# Altium PCB PCB.PcbDoc
Units mm, origin at the board's own origin, x right, y up, seen from the top; angles counter-clockwise.
Board outline 46.18 x 31.32 mm, 2 copper layers (Top Layer, Bottom Layer); 9 components, 7 nets, 25 pads, 0 vias.
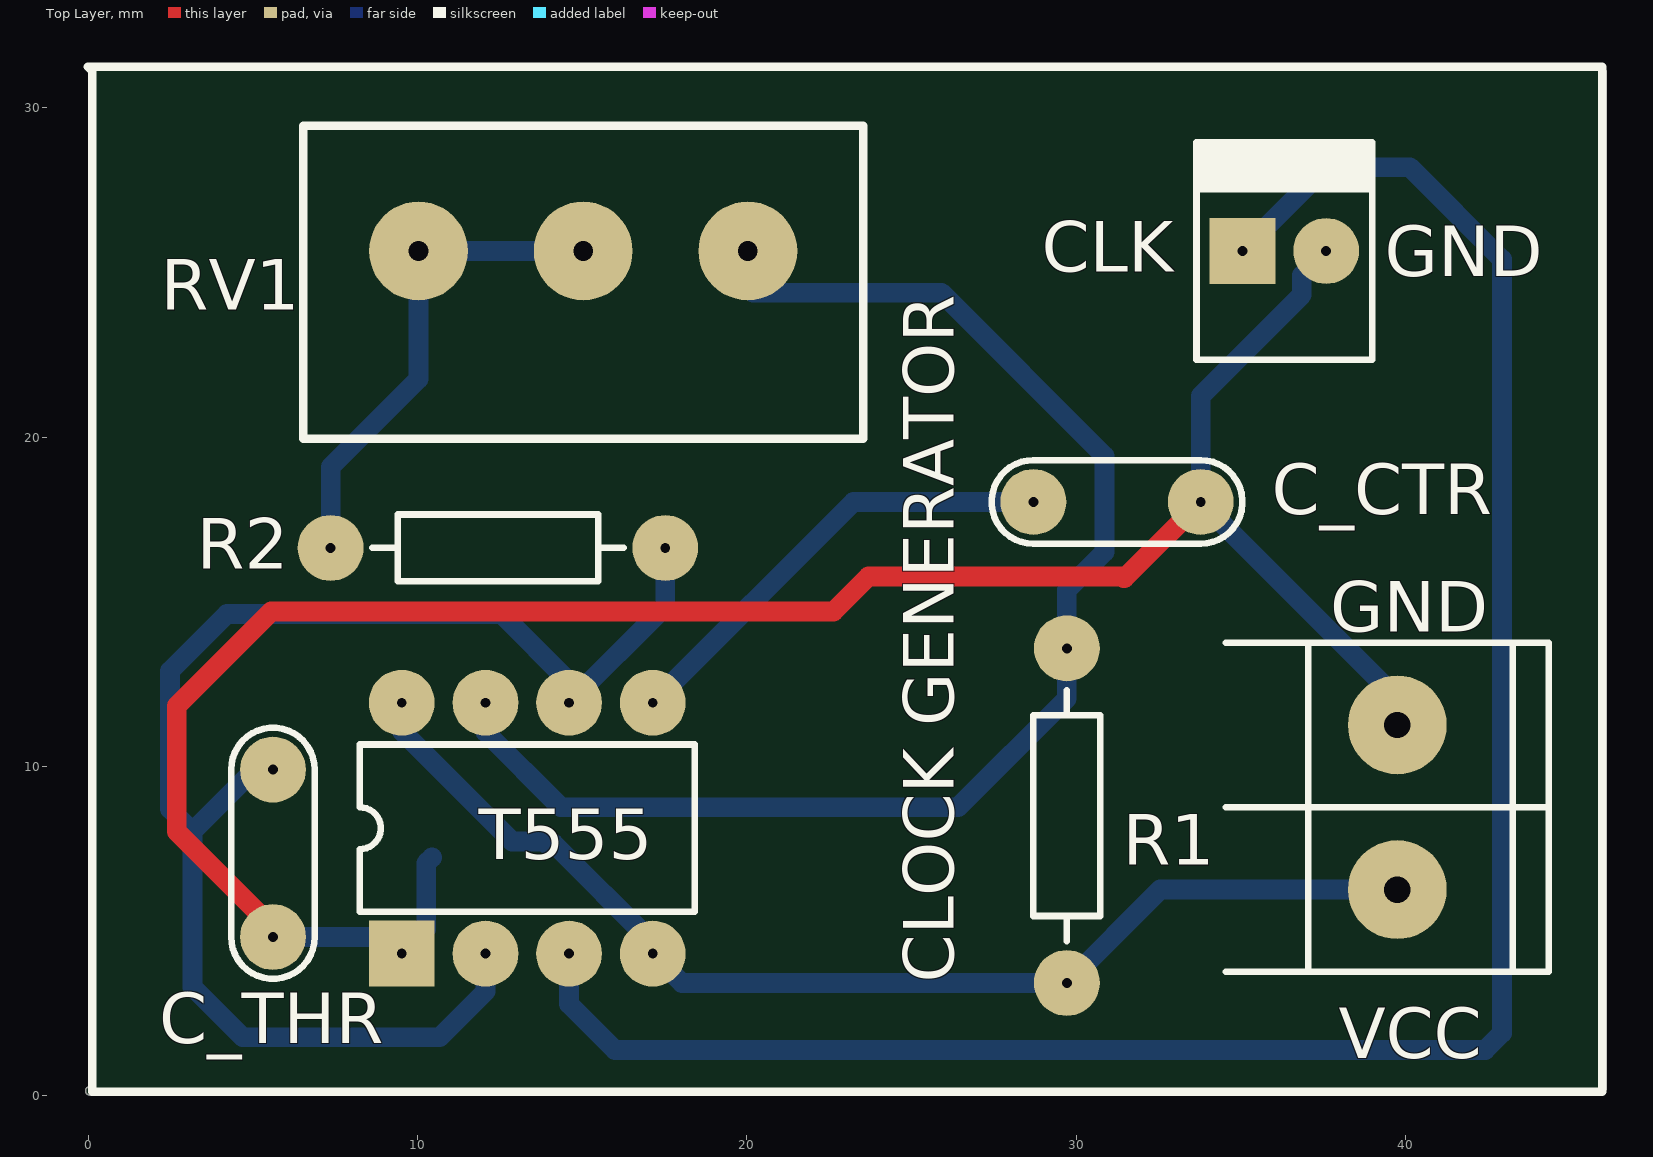
[diagram p0: Top Layer view]
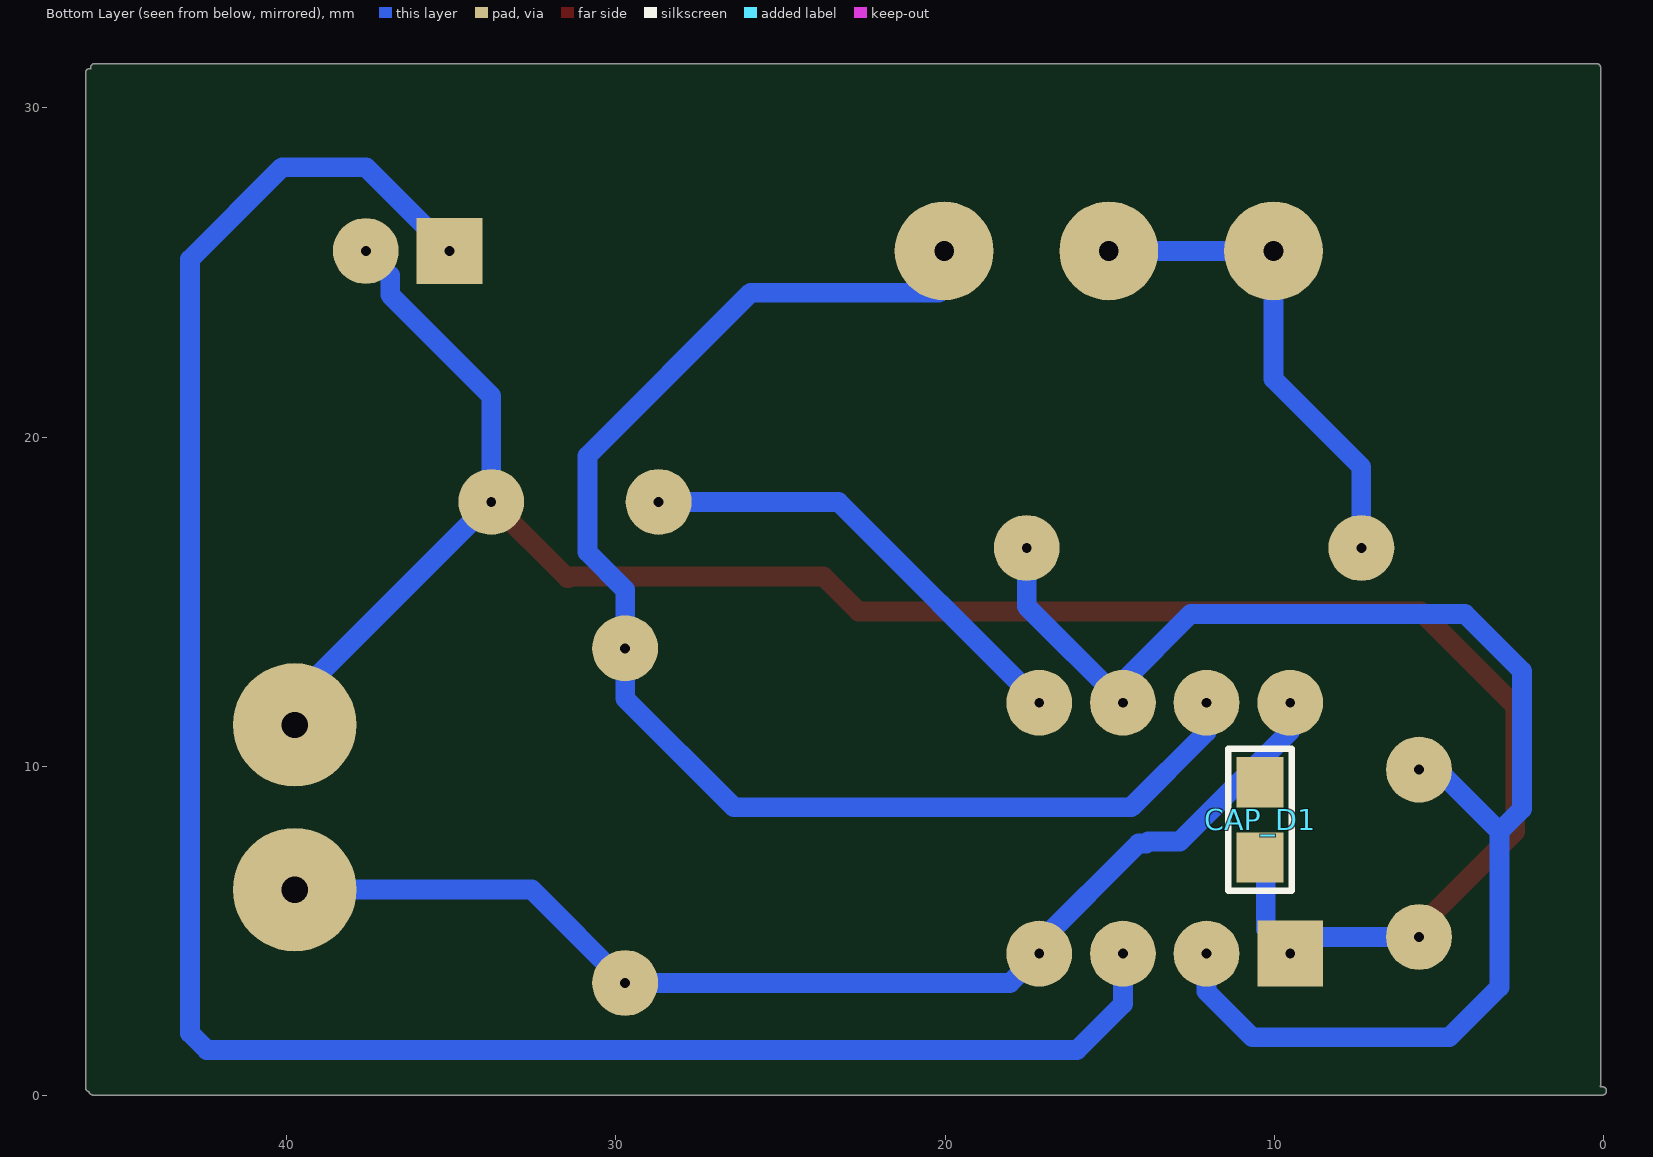
[diagram p1: Bottom Layer view, seen from below]
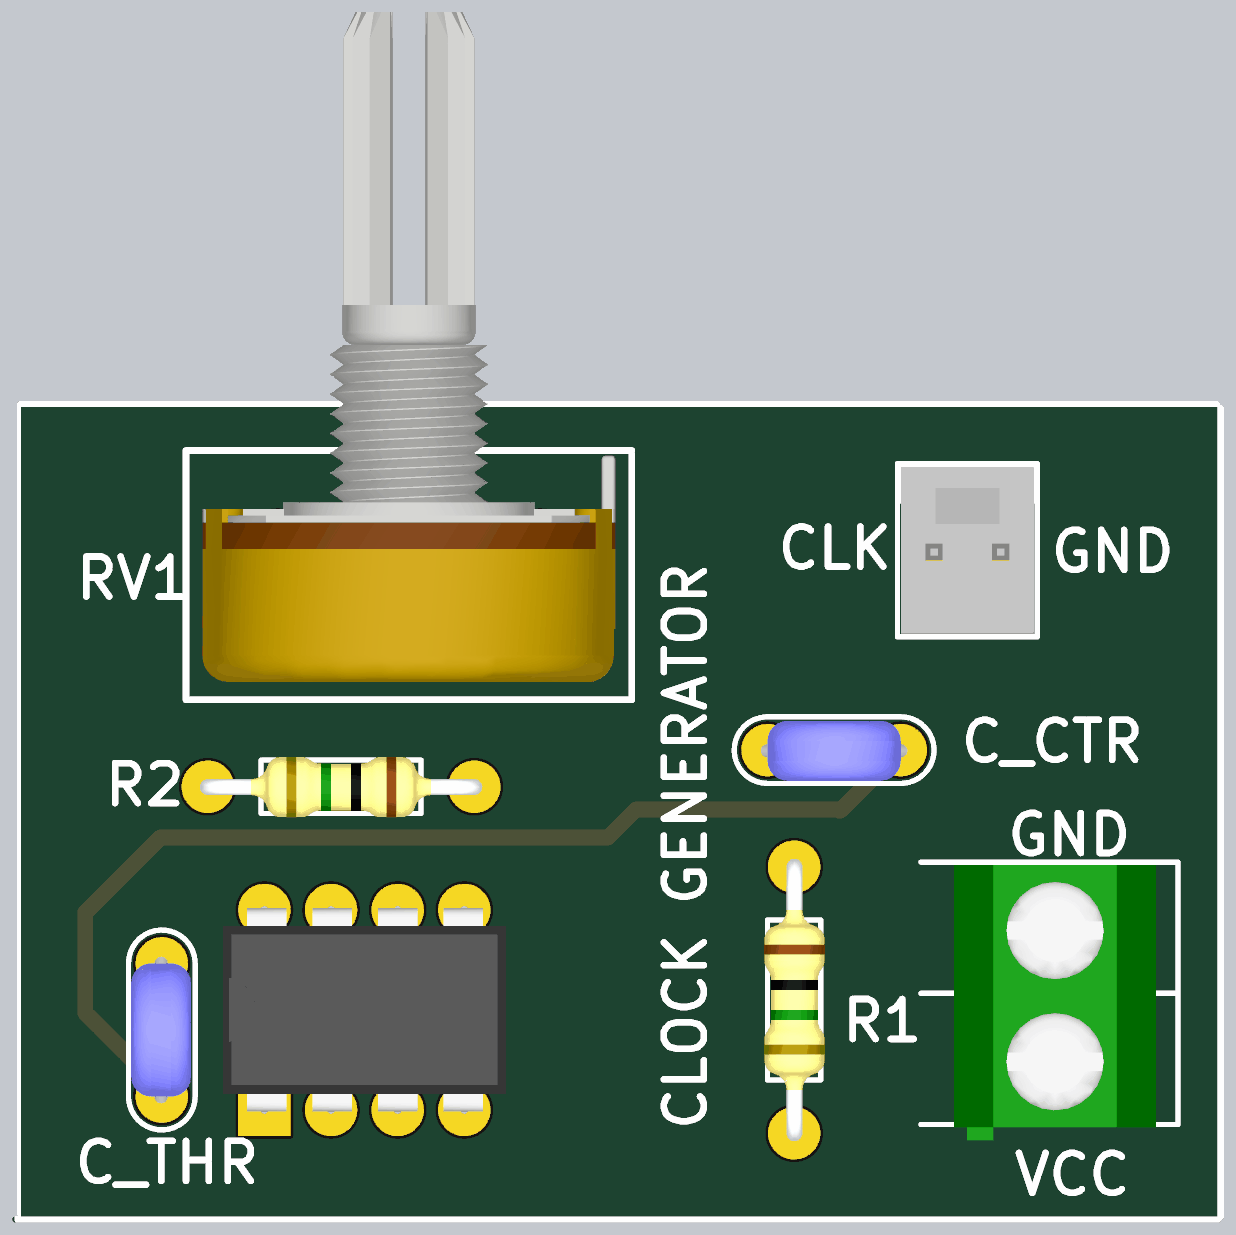
[diagram p2: 3D render of the assembled board from above, using the file's embedded part models]

## Layer stack, top to bottom
Top Solder: solder mask 0.0102, Solder Resist, Dk 3.5
Top Layer: signal copper 0.0356
Dielectric 1: dielectric 0.32, FR-4, Dk 4.8
Bottom Layer: signal copper 0.0356
Bottom Solder: solder mask 0.0102, Solder Resist, Dk 3.5

## Board outline
0.051,0.025 cw(c0.051,0.152) 0.051,0.28 0.112,0.28 cw(c0.229,0.33) 0.101,0.33 0.101,31.217 cw(c0.229,31.217) 0.229,31.344 45.822,31.344 cw(c45.822,31.217) 45.949,31.217 cw(c45.822,31.217) 45.946,31.188 cw(c45.974,31.064) 46.101,31.064 46.101,0.254 cw(c45.974,0.254) 45.998,0.129 cw(c45.872,0.152) 45.872,0.025

## Design rules (kind name [scope] priority, off if disabled: settings)
Clearance [All] p1: gap=0.5 ignorepadtopadclearanceinfootprint=FALSE
PolygonConnect [All] p1: connectstyle=Relief reliefconductorwidth=0.254 reliefentries=4 polygonreliefangle="90 Angle" airgapwidth=0.254
RoutingVias [All] p1: holewidth=0.711 width=1.27 viastyle="Through Hole" minholewidth=0.711 minwidth=1.27 maxholewidth=0.711 maxwidth=1.27
SolderMaskExpansion [All] p1: expansion=0.102
Width [All] p1: maxlimit=0.6 minlimit=0.6 preferedwidth=0.6
30 further rules are at their usual default settings.

## Classes and differential pairs
component class Schematic: C_CTR C_THR CLK R1 R2 RV1 T555 VCC

## Components (designator, comment, footprint, x,y, rotation, side; value= is the part's Value field where it differs from the comment)
C_CTR "10nF" CAP200 31.242,18.034 r0 top (schematic designator CAP_CTRL)
C_THR "1uF" CAP200 5.613,7.366 r270 top (schematic designator CAP_THRESH)
CAP_D1 "100nF" 0805 10.439,8.382 r270 bottom
CLK "ALOJ_POL1" MOLEX2 35.052,25.654 r0 top
R1 "1M" RES400 29.718,13.589 r270 top
R2 "100K" RES400 17.526,16.637 r180 top
RV1 "250K" POTENCIOMETRO 15.033,25.654 r180 top
T555 "LM555" DIP8 9.525,4.318 r90 top
VCC "BORNERA 2" BORNERA2 39.751,8.763 r180 top

## Footprints (in the part's own frame and the unit in brackets; to place one, negate y for a bottom-side part, rotate by r counter-clockwise, add the part's x,y. Pads: shape width x height; smd on the part's side, far side on the other; paste and mask are expansions set on the pad)
0805 [mil] "Pasivo 0805"
  rect 60x56 smd: 1(-45,0) 2(45,0)
  silkscreen extent -85,-38 85,38, body extent -40,-25 39,25, height 15
BORNERA2 [mm] "Bornera con Tornillos 5mm separación"
  round 3 / inner round 3.75 / far side round 3.75 hole 0.8: 1(0,2.5) 2(0,-2.5)
  silkscreen extent -4.6,-5 5.2,5, body extent -3.76,-4.89 3.94,5.61, height 10
CAP200 [mm]
  round 2 hole 0.3: 1(-2.54,0) 2(2.54,0)
  silkscreen extent -3.81,-1.27 3.81,1.27, body extent -2.79,-1.17 2.79,1.12, height 6.24
DIP8 [mm]
  rect 2x2 hole 0.3: 1(0,0)
  round 2 hole 0.3: 2(0,-2.54) 3(0,-5.08) 4(0,-7.62) 5(7.62,-7.62) 6(7.62,-5.08) 7(7.62,-2.54) 8(7.62,0)
  silkscreen extent 1.27,-8.89 6.35,1.27, body extent -0.06,-9.21 7.7,1.59, height 4.5
MOLEX2 [mm]
  rect 2x2 hole 0.3: 1(0,0)
  round 2 hole 0.3: 2(2.54,0)
  silkscreen extent -1.4,-3.3 3.94,3.3, body extent -1.27,-3.17 3.81,3.17, height 10.74
POTENCIOMETRO [mm]
  round 3 hole 0.6 paste+0: 1(5,0) 2(0,0) 3(-5,0)
  silkscreen extent -8.5,-3.8 8.5,5.7, body extent -7.87,-20.53 7.87,5.03, height 20.12
RES400 [mm]
  round 2 hole 0.3: 1(0,0) 2(10.16,0)
  silkscreen extent 1.27,-1.02 8.89,1.02, body extent -0.3,-1.14 10.46,1.17, height 2.43

## Part data
C_CTR C_THR CAP_D1: library part CAP
CLK: library part MOLEX2
R1 R2: library part RES
RV1: library part POTENCIOMETRO
T555: "Timer"

## Nets (pads, with @x,y where several pads share a name; then routed paths per layer and width w, separated by ;. In a path a pad name is that pad's centre, name@x,y a point inside that pad or via, vN(x,y) a via of type N, cw(c..) or ccw(c..) an arc to the next point about the centre after c; other vN are vias at no path point)
NetCAP_CTRL_1: C_CTR.1 T555.5 | length 14.1
  Bottom Layer w0.6: T555.5 23.241,18.034 C_CTR.1
NetCAP_CTRL_2: C_CTR.2 C_THR.2 CAP_D1.2 CLK.2 T555.1 VCC.2 | length 67.8
  Top Layer w0.6: C_THR.2 5.613,5.105 2.692,8.026 2.692,11.836 5.563,14.707 22.631,14.707 23.698,15.773 31.394,15.773 31.445,15.723 31.471,15.723 C_CTR.2
  Bottom Layer w0.6: C_THR.2 9.017,4.826 T555.1 10.265,5.058 10.265,7.065 CAP_D1.2 ; CLK.2 36.852,24.914 36.852,24.323 33.782,21.253 C_CTR.2 39.751,12.065 VCC.2
NetCAP_D1_1: CAP_D1.1 R1.2 T555.4 T555.8 VCC.1 | length 35.6
  Bottom Layer w0.6: T555.8 9.525,11.074 12.878,7.722 13.837,7.722 13.895,7.663 14.13,7.663 17.145,4.648 T555.4 18.034,3.429 R1.2 32.552,6.263 VCC.1
NetCAP_THRESH_1: C_THR.1 R2.1 T555.2 T555.6 | length 44.6
  Bottom Layer w0.6: C_THR.1 5.055,9.906 3.175,8.026 ; T555.2 12.065,3.175 10.668,1.778 4.699,1.778 3.175,3.302 3.175,8.026 ; T555.6 T555.6@14.605,11.944 ; R2.1 17.526,14.865 T555.6@14.605,11.944 ; 3.175,8.026 2.489,8.712 2.489,12.903 4.216,14.63 12.548,14.63 14.605,12.573 T555.6@14.605,11.944
NetCLK_1: CLK.1 T555.3 | length 64.2
  Bottom Layer w0.6: T555.3 14.605,2.794 16.002,1.397 42.418,1.397 42.926,1.905 42.926,25.4 40.132,28.194 37.586,28.194 35.052,25.66 CLK.1
NetR1_1: R1.1 RV1.3 T555.7 | length 41.4
  Bottom Layer w0.6: T555.7 12.065,11.049 14.351,8.763 26.416,8.763 29.718,12.065 R1.1 29.718,15.367 30.861,16.51 30.861,19.431 25.908,24.384 RV1.3@20.193,24.384
NetR2_2: R2.2 RV1.1 RV1.2 | length 15.1
  Bottom Layer w0.6: R2.2 7.366,19.097 10.033,21.764 RV1.1 RV1.2

## Silkscreen, mask and mechanical layers (free items; w line width, h text height)
Top Overlay:
  lines w0.254: -0.004,31.242 0.127,31.111 0.127,0.127 45.974,0.127 45.974,31.242 -0.004,31.242
  text "GND" at 39.37,24.892 h1.52
  text "GND" at 37.719,14.097 h1.52
  text "CLOCK GENERATOR" at 26.289,3.429 h1.52 r90
Drill Drawing:
  lines w0.254: 0.051,0.152 0.229,0.33 0.229,31.217 45.822,31.217 45.974,31.064 45.974,0.254 45.872,0.152 0.051,0.152